# Altium PCB STM32Ethernet.PcbDoc
Units mil, origin at the board's own origin, x right, y up, seen from the top; angles counter-clockwise.
Board outline 1771.65 x 2559.06 mil, 2 copper layers (Top Layer, Bottom Layer), stack 64.8 mil thick; 65 components, 62 nets, 409 pads, 108 vias.
Unrouted connection lines stored in the file: 16.
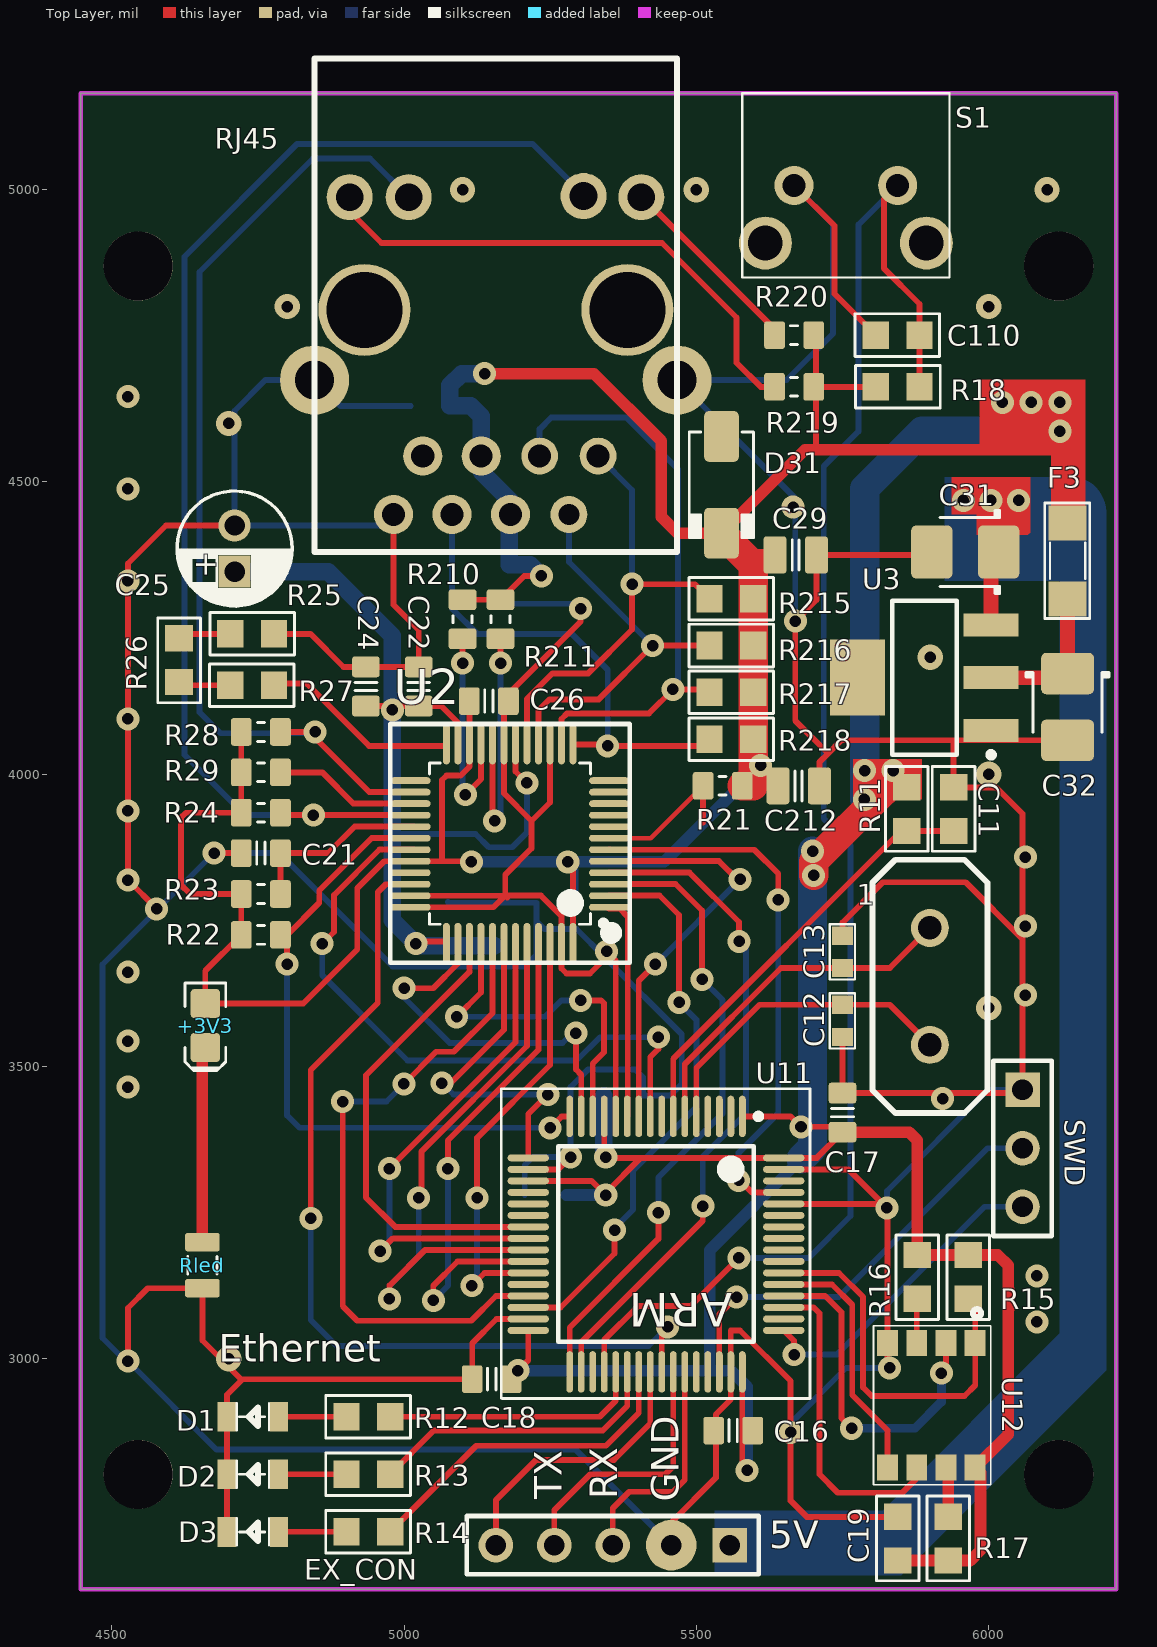
[diagram p0: Top Layer view]
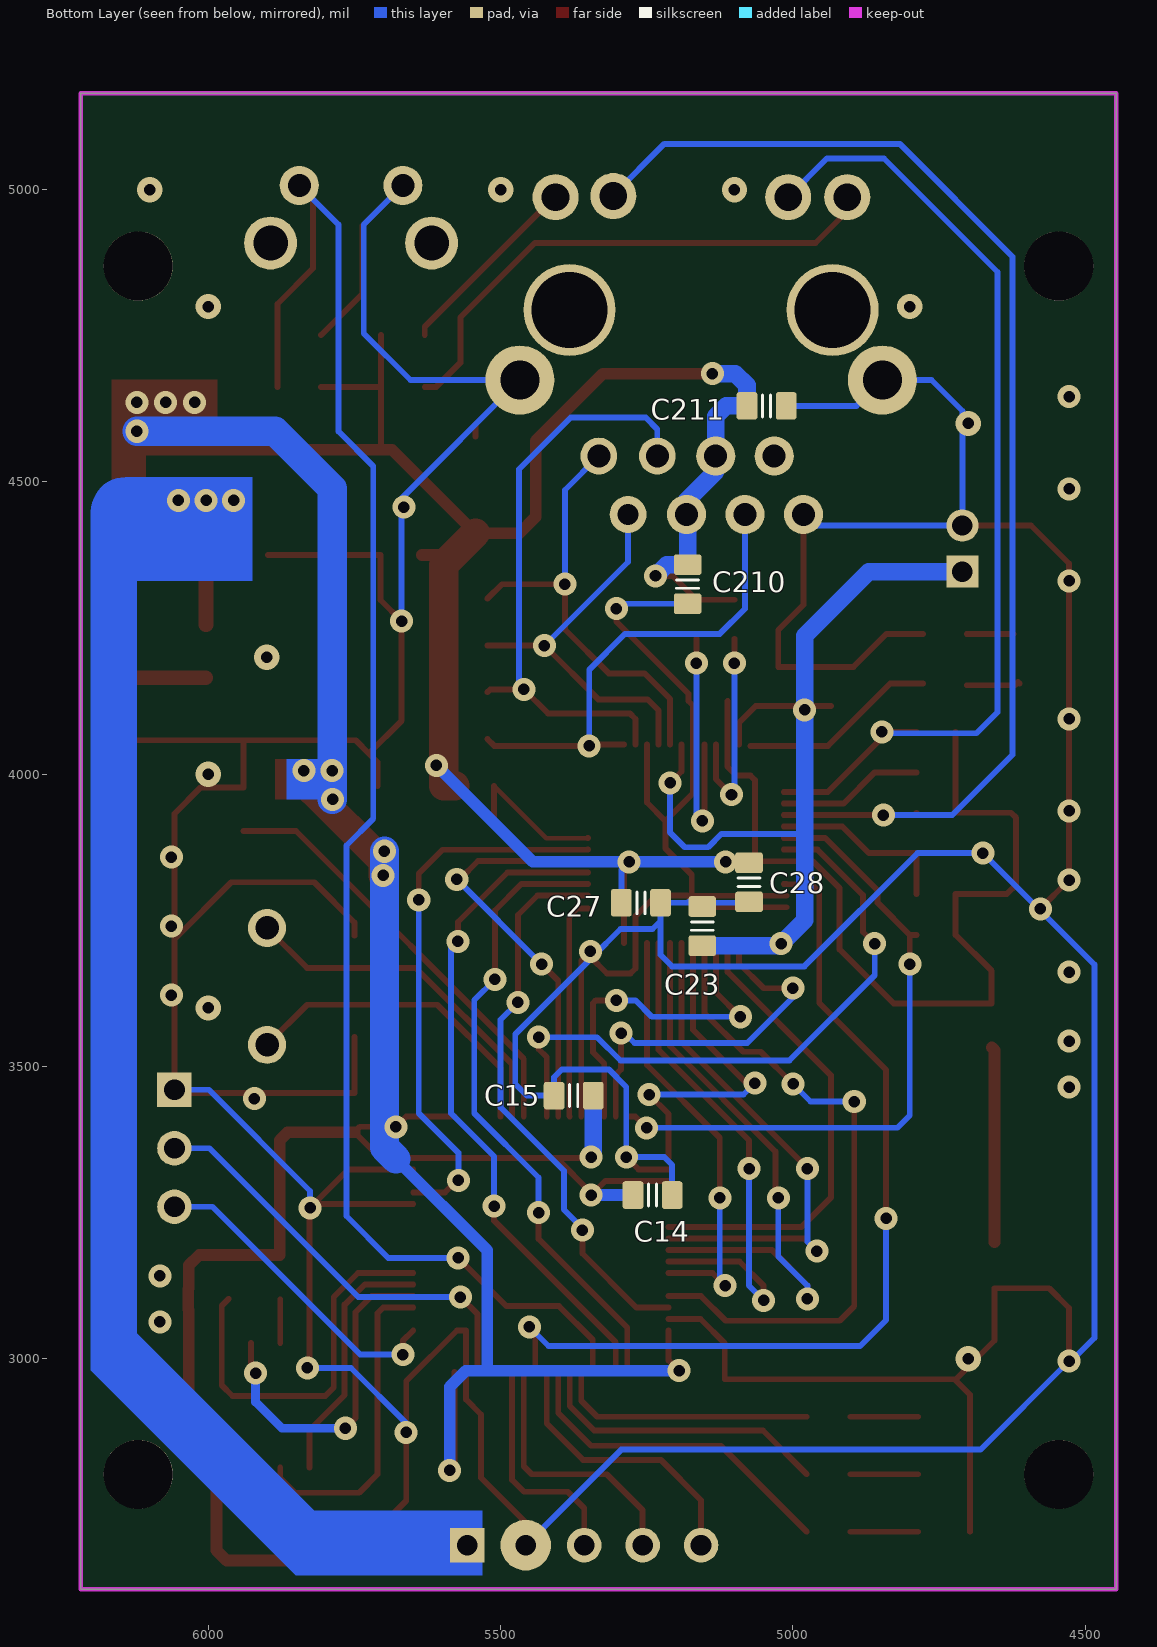
[diagram p1: Bottom Layer view, seen from below]
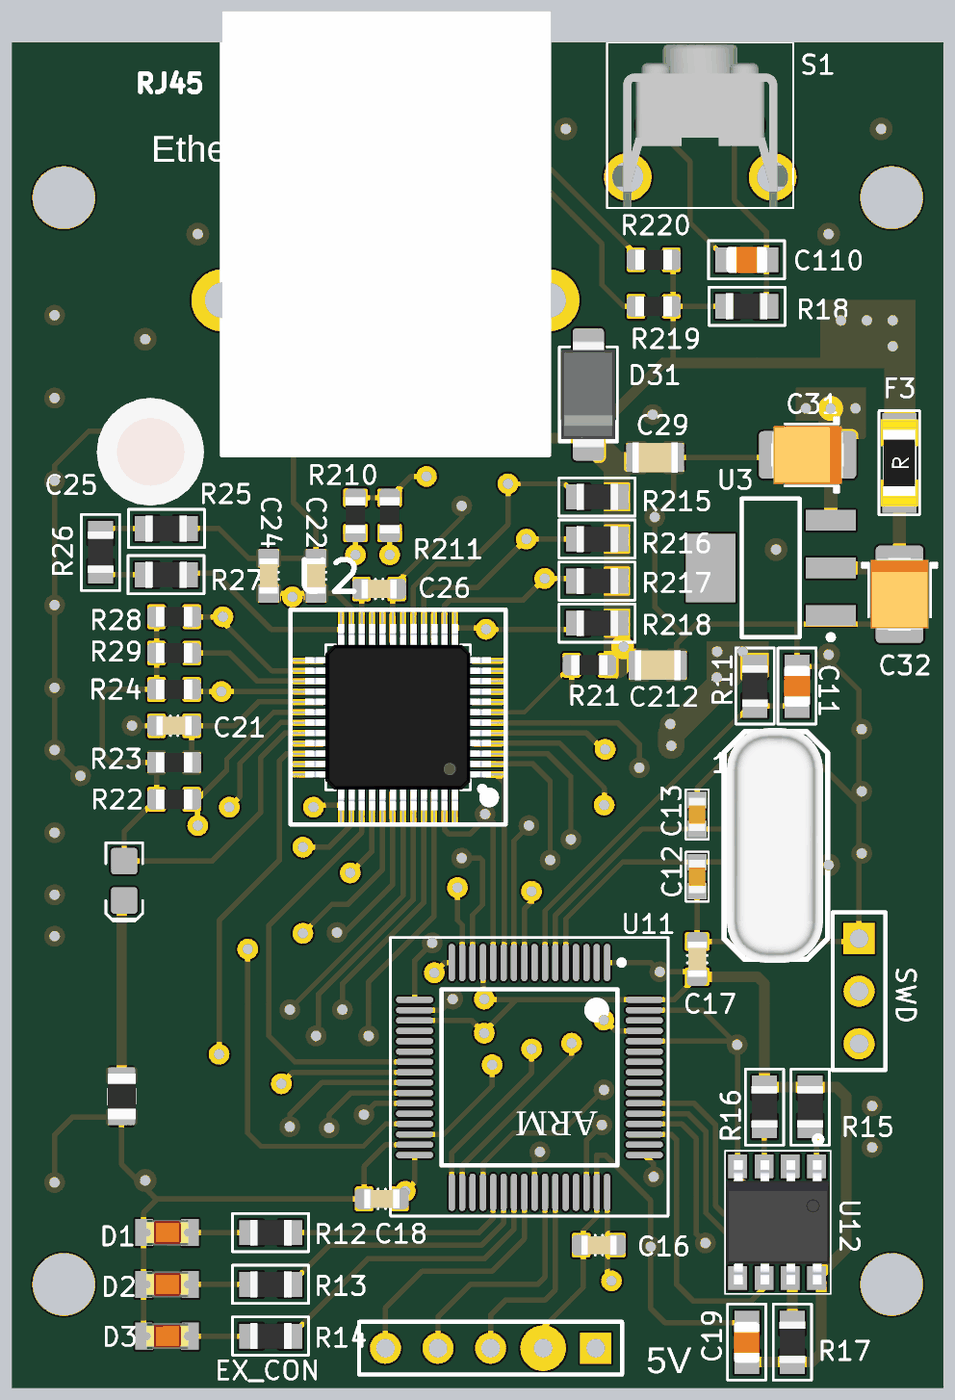
[diagram p2: 3D render of the assembled board from above, using the file's embedded part models]
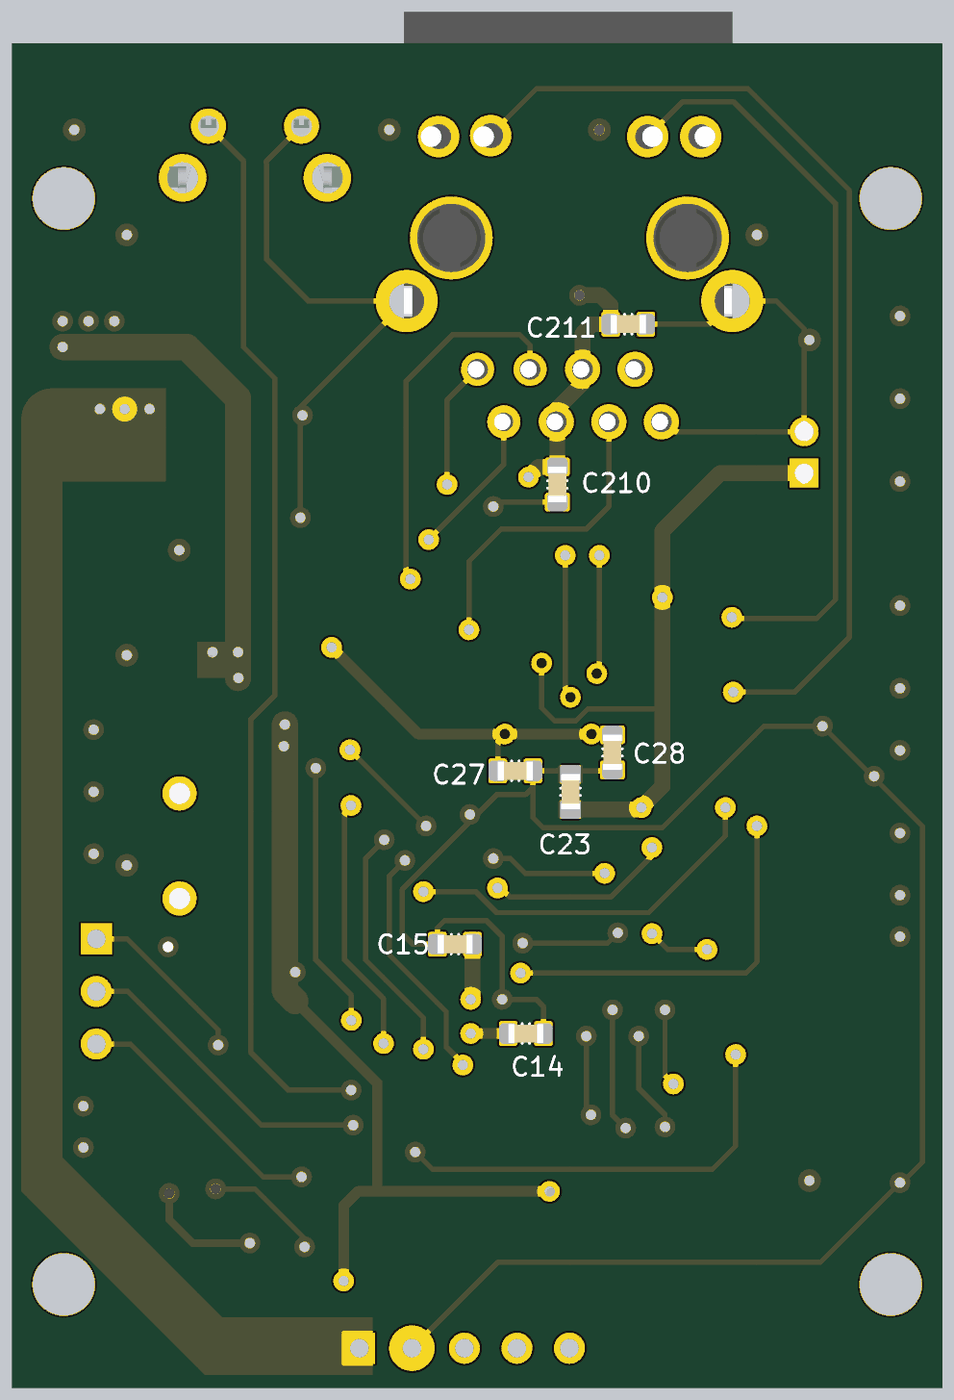
[diagram p3: 3D render of the assembled board from below, using the file's embedded part models]

## Layer stack, top to bottom
Top Solder: solder mask 0.4, Solder Resist, Dk 3.5
Top Layer: signal copper 1.4
Dielectric 1: dielectric 62, FR-4, Dk 4.8
Bottom Layer: signal copper 1.4
Bottom Solder: solder mask 0.4, Solder Resist, Dk 3.5

## Board outline
4446.73,2605.47 4446.73,5164.53 6218.39,5164.53 6218.39,2605.47

## Design rules (kind name [scope] priority, off if disabled: settings)
Clearance [All] p1: gap=7
Length [InNetClass('ETH_SIGN')] p1: maxlimit=1299.21 minlimit=1062.99
PlaneConnect [All] p1: planeconnectstyle=Relief reliefexpansion=20 reliefentries=4 reliefconductorwidth=25 reliefairgap=10
PolygonConnect PAD_GND [(InPadClass('All Pads') AND InNet('GND'))] p1: connectstyle=Relief reliefconductorwidth=25 reliefentries=4 polygonreliefangle="90 Angle" airgapwidth=10
PolygonConnect [All] p2: connectstyle=Direct reliefconductorwidth=10 reliefentries=4 polygonreliefangle="90 Angle" airgapwidth=10
RoutingVias [All] p1: holewidth=27.56 width=47.24 viastyle="Through Hole" minholewidth=19.68 minwidth=39.37 maxholewidth=196.85 maxwidth=196.85
SolderMaskExpansion [All] p1: expansion=4
Width Width_1 [All] p1: maxlimit=100 minlimit=8 preferedwidth=10
Width [InNetClass('ETH_SIGN')] p2: maxlimit=8 minlimit=8 preferedwidth=8
29 further rules are at their usual default settings.

## Classes and differential pairs
net class SPI_DATA: STM_SPI_MISO STM_SPI_MOSI STM_SPI_SCK
net class ETH_SIGN: MII_COL MII_CRS_WKUP MII_MDC MII_MDIO MII_RX_ER MII_RXD0 MII_RXD1 MII_RXD2 MII_RXD3 MII_TX_CLK MII_TX_EN MII_TXD0 MII_TXD1 MII_TXD2 MII_TXD3

## Components (designator, comment, footprint, x,y, rotation, side; value= is the part's Value field where it differs from the comment)
1 "CRY_25MHZ" cry 5899.49,3636.97 r270 top
+3V3 "Blue" LED-0805-K 4660,3570 r270 top
C11 "CAP_102_0603" CAP_0805_TOP 5940,3940 r90 top
C12 "CAP_18pF_0603" CAP_0603_TOP 5749.88,3577.91 r270 top
C13 "CAP_18pF_0603" CAP_0603_TOP 5749.88,3696.02 r90 top
C14 "CAP_104_0603" CAPC1608N_F#1 5240,3280 r180 bottom
C15 "CAP_104_0603" CAPC1608N_F#1 5375,3450 r0 bottom
C16 "CAP_104_0603" CAPC1608N_F#2 5563,2877 r180 top
C17 "CAP_104_0603" CAPC1608N_F#2 5750,3421 r90 top
C18 "CAP_104_0603" CAPC1608N_F#2 5150,2965 r180 top
C19 "CAP_104_0603" CAP_0805_TOP 5844.37,2692.09 r90 top
C21 "CAP_102_0603" CAPC1608N_F#2 4755,3865 r0 top
C22 "CAP_104_0603" CAPC1608N_F#3 5025,4150 r270 top
C23 "CAP_104_0603" CAPC1608N_F#4 5155,3740 r270 bottom
C24 "CAP_104_0603" CAPC1608N_F#3 4934.75,4150 r270 top
C25 "CAP_10uF/35V" CAP_10uF/35V 4710,4385 r90 top
C26 "CAP_104_0603" CAPC1608N_F#2 5145,4125 r180 top
C27 "CAP_104_0603" CAPC1608N_F#1 5260,3780 r180 bottom
C28 "CAP_104_0603" CAPC1608N_F#1 5075,3815 r90 bottom
C29 "CAP_104_0603" CAPC2012N_F 5670,4375 r0 top
C31 "330uF/25V" CAPMP3528X210N 5960,4380 r180 top
C32 "330uF/25V" CAPMP3528X210N 6135,4115 r270 top
C110 "CAP_102_0603" CAP_0805_TOP 5844.37,4751.14 r180 top
C210 "105" CAPC1608N_F#1 5180,4325 r270 bottom
C211 "105" CAPC1608N_F#1 5045,4630 r180 bottom
C212 "105" CAPC2012N_F 5675,3980 r0 top
D1 "LED_RED_0805" "LED 0805 TOP" 4742.01,2900.75 r0 top
D2 "LED_BLUE_0805" "LED 0805 TOP" 4742.01,2802.32 r0 top
D3 "LED_GREEN_0805" "LED 0805 TOP" 4742.01,2703.9 r0 top
D31 "Diode" DO-214AC 5543,4495 r270 top
EX_CON "EX_CON" HDR1X5 5557,2681 r180 top
F3 "fuse_200mA_1206" "SMD 1206" 6135,4365 r90 top
R11 "Res_4.7K_0805" RES_0805_TOP 5860,3940 r90 top
R12 "Res_330R_0805" RES_0805_TOP 4938.86,2900.75 r180 top
R13 "Res_330R_0805" RES_0805_TOP 4938.86,2802.32 r180 top
R14 "Res_330R_0805" RES_0805_TOP 4938.86,2703.9 r180 top
R15 "Res_4.7K_0805" RES_0805_TOP 5965,3140 r270 top
R16 "Res_4.7K_0805" RES_0805_TOP 5878,3140 r270 top
R17 "Res_4.7K_0805" RES_0805_TOP 5930.98,2692.09 r90 top
R18 "Res_4.7K_0805" RES_0805_TOP 5844.37,4662.56 r0 top
R21 "Res_2.2K_0805" RESC1608N_F#1 5545,3980 r0 top
R22 "Res_1.5K_0805" RESC1608N_F#1 4755,3725 r0 top
R23 "Res_4.7K_0805" RESC1608N_F#2 4755,3795 r180 top
R24 "Res_2.2K_0805" RESC1608N_F#1 4755,3934.07 r180 top
R25 "Res_47R_0805" RES_0805_TOP 4740,4240 r0 top
R26 "Res_120R_0805" RES_0805_TOP 4615,4195 r270 top
R27 "Res_4.7K_0805" RES_0805_TOP 4740,4152.16 r180 top
R28 "Res_0R_0603" RESC1608N_F#1 4755,4072.2 r0 top
R29 "Res_0R_0603" RESC1608N_F#1 4755,4003.13 r180 top
R210 "2k2" RESC1608N_F#1 5100,4265 r90 top
R211 "2k2" RESC1608N_F#1 5165,4265 r90 top
R215 "Res_49.9R_0805" RES_0805_TOP 5560,4300 r180 top
R216 "Res_49.9R_0805" RES_0805_TOP 5560,4220 r180 top
R217 "Res_49.9R_0805" RES_0805_TOP 5560,4140 r180 top
R218 "Res_49.9R_0805" RES_0805_TOP 5560,4060 r180 top
R219 "220R" RESC1608N_F#1 5667.2,4662.56 r180 top
R220 "220R" RESC1608N_F#1 5667.2,4751.14 r180 top
RJ45 "HR911105A" HR911105A 4845,4370 r0 top
Rled "Res_0805_1k" RESC2012N_F 4655,3160 r270 top
S1 "BUTTON 2P" "Nut nhan 2 chan  dung" 5765.63,5007.05 r0 top
SWD "Header 3" HDR1X3 6058,3460 r270 top
U2 "DP83848CVV" LQFP48 5181,3881 r180 top
U3 "AS1117-3V3" SOT223-4N 5890,4165 r180 top
U11 "STM32F107" LQFP64_N 5430.98,3196.02 r270 top locked
U12 "S25FL204K" SOIC_8 5903.43,2920.43 r270 top

## Footprints (in the part's own frame and the unit in brackets; to place one, negate y for a bottom-side part, rotate by r counter-clockwise, add the part's x,y. Pads: shape width x height; smd on the part's side, far side on the other; paste and mask are expansions set on the pad)
CAP_10uF/35V [mil]
  rect 55.12x55.12 hole 35: 1(-38.39,0)
  round 55 hole 35: 2(40.35,0)
  silkscreen extent -97,-98 99,98, body extent -101,-101 104,101, height 30
CAP_0603_TOP [mm]
  rect 0.8x0.9 smd: 1(-0.7,0) 2(0.7,0)
  silkscreen extent -1.2,-0.55 1.2,0.55, body extent -0.8,-0.4 0.8,0.4, height 0.7
CAP_0805_TOP [mm]
  rect 1.14x1.2 smd: 1(-0.95,0) 2(0.95,0)
  silkscreen extent -1.83,-0.92 1.85,0.93, body extent -1,-0.62 1,0.63, height 0.8
CAPC1608N_F#1 [mm] "Chip Capacitor, Body 1.6x0.8mm, 0603, IPC Medium Density, for Flex circuits"
  round 0.254 on Mech14: 0(0,0)
  rrect50% 1.1x1 on Bottom Solder: 1(-0.85,0) 1(0.85,0)
  rrect25% 0.9x1.2 smd paste-1: 1(-0.85,0) 2(0.85,0)
  rrect50% 0.9x1 on Bottom Paste: 1(-0.85,0) 1(0.85,0)
  Top Layer pour cut-out: -0.4,0.6 0.4,0.6 0.4,-0.6 -0.4,-0.6
  silkscreen extent -0.18,-0.48 0.18,0.48, body extent -0.85,-0.45 0.85,0.45, height 0.89
CAPC1608N_F#2 [mm] "Chip Capacitor, Body 1.6x0.8mm, 0603, IPC Medium Density, for Flex circuits"
  round 0.254 on Mech14: 0(0,0)
  rrect50% 1.1x1 on Top Solder: 1(-0.85,0) 1(0.85,0)
  rrect25% 0.9x1.2 smd paste-1: 1(-0.85,0) 2(0.85,0)
  rrect50% 0.9x1 on Top Paste: 1(-0.85,0) 1(0.85,0)
  Top Layer pour cut-out: -0.4,0.6 0.4,0.6 0.4,-0.6 -0.4,-0.6
  silkscreen extent -0.18,-0.48 0.18,0.48, body extent -0.85,-0.45 0.85,0.45, height 0.89
CAPC1608N_F#3 [mm] "Chip Capacitor, Body 1.6x0.8mm, 0603, IPC Medium Density, for Flex circuits"
  round 0.254 on Mech14: 0(0,0)
  rrect25% 1.1x1 on Top Solder: 1(-0.85,0) 1(0.85,0)
  rrect25% 0.9x1.2 smd paste-1: 1(-0.85,0) 2(0.85,0)
  rrect25% 0.9x1 on Top Paste: 1(-0.85,0) 1(0.85,0)
  Top Layer pour cut-out: -0.4,0.6 0.4,0.6 0.4,-0.6 -0.4,-0.6
  silkscreen extent -0.18,-0.48 0.18,0.48, body extent -0.85,-0.45 0.85,0.45, height 0.89
CAPC1608N_F#4 [mm] "Chip Capacitor, Body 1.6x0.8mm, 0603, IPC Medium Density, for Flex circuits"
  round 0.254 on Mech14: 0(0,0)
  rrect25% 1.1x1 on Bottom Solder: 1(-0.85,0) 1(0.85,0)
  rrect25% 0.9x1.2 smd paste-1: 1(-0.85,0) 2(0.85,0)
  rrect25% 0.9x1 on Bottom Paste: 1(-0.85,0) 1(0.85,0)
  Top Layer pour cut-out: -0.4,0.6 0.4,0.6 0.4,-0.6 -0.4,-0.6
  silkscreen extent -0.18,-0.48 0.18,0.48, body extent -0.85,-0.45 0.85,0.45, height 0.89
CAPC2012N_F [mm] "Chip Capacitor, Body 2.0x1.2mm, 0805, IPC Medium Density, for Flex circuits"
  round 0.254 on Mech14: 0(0,0)
  rrect25% 1.2x1.4 on Top Solder: 1(-0.9,0) 1(0.9,0)
  rrect25% 1x1.6 smd paste-1: 1(-0.9,0) 2(0.9,0)
  rrect25% 1x1.4 on Top Paste: 1(-0.9,0) 1(0.9,0)
  Top Layer pour cut-out: -0.4,0.8 0.4,0.8 0.4,-0.8 -0.4,-0.8
  silkscreen extent -0.15,-0.65 0.15,0.65, body extent -1.1,-0.72 1.1,0.73, height 1.34
CAPMP3528X210N [mm] "Molded body capacitor, Body 3.5x2.8mm, 1210, IPC Nominal settings"
  round 0.254 on Mech14: 0(0,0)
  rrect25% 1.8x2.3 smd: 1(-1.45,0) 2(1.45,0)
  Top Layer pour cut-out: -0.508,1.27 0.508,1.27 0.508,-1.27 -0.508,-1.27
  silkscreen extent -1.5,-1.8 1.1,1.8, body extent -1.75,-1.4 1.75,1.4, height 2.1
cry [mil]
  round 65 hole 40: 1(-100,0) 2(100,0)
  silkscreen extent -217,-98 217,98, body extent -223,-93 223,90, height 146
DO-214AC [mm] "JEDEC DO214 variation AC. SMA"
  round 0.508 on Mech14: 0(0,0)
  rrect25% 2.2x1.5 smd: A(-2.1,0) K(2.1,0)
  silkscreen extent -2.3,-1.4 2.3,1.4, body extent -2.6,-1.3 2.6,1.3, height 2.42
HDR1X3 [mm] "Connector; Header; 3 Position"
  rect 1.5x1.5 hole 0.9: 1(0,0)
  round 1.5 hole 0.9: 2(2.54,0) 3(5.08,0)
  silkscreen extent -1.27,-1.27 6.35,1.27, body extent -1.27,-1.27 6.35,1.27, height 7
HDR1X5 [mm] "Connector; Header; 5 Position"
  rect 1.5x1.5 hole 0.9: 1(0,0)
  round 2.2 hole 0.9: 2(2.54,0)
  round 1.5 hole 0.9: 3(5.08,0) 4(7.62,0) 5(10.16,0)
  silkscreen extent -1.27,-1.27 11.43,1.27
HR911105A [mm] "HanRun HR911105A"
  round 1.6 hole 1: 1(12.369,4.425) 3(9.829,4.425)
  round 1.6 hole 0.9: 2(11.099,1.885)
  round 1.7 hole 1: 4(8.559,1.885) 5(7.289,4.425) 6(6.019,1.885) 7(4.749,4.425) 8(3.479,1.885)
  round 2 hole 1.2: 9(14.249,15.675) 10(11.735,15.723) 11(4.139,15.675) 12(1.575,15.672)
  round 3 hole 1.7: G(0.049,7.725) G(15.799,7.725)
  round 4 hole 3.3: H(2.209,10.775) H(13.639,10.775)
  silkscreen extent 0.05,0.25 15.8,21.69, body extent 0.05,0.29 15.93,21.69, height 13.51
"LED 0805 TOP" [mm]
  rect 0.8x1.3 smd: 1(1.118,0) 2(-1.143,0)
  silkscreen extent -0.71,-0.58 0.69,0.58, body extent -1.01,-0.62 1.01,0.63, height 1.1
LED-0805-K [mil]
  round 20 on Mech14: 0(0,0)
  rrect25% 50x50 smd: A(-37.5,0) K(37.5,0)
  Top Layer pour cut-out: -15,30 15,30 15,-30 -15,-30
  silkscreen extent -72,-35 77,35, body extent -39,-25 39,25, height 31
LQFP48 [mm] "Thin QFP, 48-Leads, Body 7x7mm, Pitch 0.5mm, IPC Medium Density"
  oval 1.75x0.3 smd paste-0.102 mask+0.051: 1(-4.318,2.761) 2(-4.318,2.261) 3(-4.318,1.761) 4(-4.318,1.261) 5(-4.318,0.761) 6(-4.318,0.261) 7(-4.318,-0.239) 8(-4.318,-0.739) 9(-4.318,-1.239) 10(-4.318,-1.739) 11(-4.318,-2.239) 12(-4.318,-2.739) 25(4.318,-2.739) 26(4.318,-2.239) 27(4.318,-1.739) 28(4.318,-1.239) 29(4.318,-0.739) 30(4.318,-0.239) 31(4.318,0.261) 32(4.318,0.761) 33(4.318,1.261) 34(4.318,1.761) 35(4.318,2.261) 36(4.318,2.761)
  oval 0.3x1.75 smd paste-0.102 mask+0.051: 13(-2.743,-4.318) 14(-2.243,-4.318) 15(-1.743,-4.318) 16(-1.243,-4.318) 17(-0.743,-4.318) 18(-0.243,-4.318) 19(0.257,-4.318) 20(0.757,-4.318) 21(1.257,-4.318) 22(1.757,-4.318) 23(2.257,-4.318) 24(2.757,-4.318) 37(2.757,4.318) 38(2.257,4.318) 39(1.757,4.318) 40(1.257,4.318) 41(0.757,4.318) 42(0.257,4.318) 43(-0.243,4.318) 44(-0.743,4.318) 45(-1.243,4.318) 46(-1.743,4.318) 47(-2.243,4.318) 48(-2.743,4.318)
  silkscreen extent -5.2,-5.2 5.2,5.18, body extent -4.5,-4.5 4.5,4.5, height 1.5
LQFP64_N [mm] "Thin QFP, 64-Leads, Body 10x10mm, Pitch 0.5mm, IPC Medium Density"
  oval 1.8x0.3 smd: 1(-5.55,3.75) 2(-5.55,3.25) 3(-5.55,2.75) 4(-5.55,2.25) 5(-5.55,1.75) 6(-5.55,1.25) 7(-5.55,0.75) 8(-5.55,0.25) 9(-5.55,-0.25) 10(-5.55,-0.75) 11(-5.55,-1.25) 12(-5.55,-1.75) 13(-5.55,-2.25) 14(-5.55,-2.75) 15(-5.55,-3.25) 16(-5.55,-3.75) 33(5.55,-3.75) 34(5.55,-3.25) 35(5.55,-2.75) 36(5.55,-2.25) 37(5.55,-1.75) 38(5.55,-1.25) 39(5.55,-0.75) 40(5.55,-0.25) 41(5.55,0.25) 42(5.55,0.75) 43(5.55,1.25) 44(5.55,1.75) 45(5.55,2.25) 46(5.55,2.75) 47(5.55,3.25) 48(5.55,3.75)
  oval 0.3x1.8 smd: 17(-3.75,-5.55) 18(-3.25,-5.55) 19(-2.75,-5.55) 20(-2.25,-5.55) 21(-1.75,-5.55) 22(-1.25,-5.55) 23(-0.75,-5.55) 24(-0.25,-5.55) 25(0.25,-5.55) 26(0.75,-5.55) 27(1.25,-5.55) 28(1.75,-5.55) 29(2.25,-5.55) 30(2.75,-5.55) 31(3.25,-5.55) 32(3.75,-5.55) 49(3.75,5.55) 50(3.25,5.55) 51(2.75,5.55) 52(2.25,5.55) 53(1.75,5.55) 54(1.25,5.55) 55(0.75,5.55) 56(0.25,5.55) 57(-0.25,5.55) 58(-0.75,5.55) 59(-1.25,5.55) 60(-1.75,5.55) 61(-2.25,5.55) 62(-2.75,5.55) 63(-3.25,5.55) 64(-3.75,5.55)
  silkscreen extent -5.67,-4.25 4.25,4.58, body extent -5,-5 5,5, height 1.6
"Nut nhan 2 chan  dung" [mm]
  round 1.7 hole 1: 1(2,0) 2(-2.5,0)
  round 2.3 hole 1.5: 3(-3.75,-2.5) 4(3.25,-2.5)
  silkscreen extent -4.75,-4 4.25,4, body extent -4.55,-3.95 4.05,3.9, height 7.8
RES_0805_TOP [mm]
  rect 1.14x1.2 smd: 1(-0.95,0) 2(0.95,0)
  silkscreen extent -1.83,-0.92 1.85,0.93, body extent -1,-0.62 1,0.62, height 0.5
RESC1608N_F#1 [mm] "Chip Resistor, Body 1.6x0.8mm, 0603, IPC Medium Density, for Flex circuits"
  round 0.254 on Mech14: 0(0,0)
  rrect50% 1.1x1 on Top Solder: 1(-0.85,0) 1(0.85,0)
  rrect25% 0.9x1.2 smd paste-1: 1(-0.85,0) 2(0.85,0)
  rrect50% 0.9x1 on Top Paste: 1(-0.85,0) 1(0.85,0)
  Top Layer pour cut-out: -0.4,0.6 0.4,0.6 0.4,-0.6 -0.4,-0.6
  silkscreen extent -0.15,-0.41 0.15,0.41, body extent -0.87,-0.47 0.88,0.48, height 0.54
RESC1608N_F#2 [mm] "Chip Resistor, Body 1.6x0.8mm, 0603, IPC Medium Density, for Flex circuits"
  round 0.254 on Mech14: 0(0,0)
  rrect25% 1.1x1 on Top Solder: 1(-0.85,0) 1(0.85,0)
  rrect25% 0.9x1.2 smd paste-1: 1(-0.85,0) 2(0.85,0)
  rrect25% 0.9x1 on Top Paste: 1(-0.85,0) 1(0.85,0)
  Top Layer pour cut-out: -0.4,0.6 0.4,0.6 0.4,-0.6 -0.4,-0.6
  silkscreen extent -0.15,-0.41 0.15,0.41, body extent -0.87,-0.47 0.88,0.48, height 0.54
RESC2012N_F [mm] "Chip Resistor, Body 2.0x1.2mm, 0805, IPC Medium Density"
  round 0.254 on Mech14: 0(0,0)
  rrect25% 1x1.3 on Top Solder: 1(-1,0) 1(1,0)
  rrect25% 0.8x1.5 smd paste-1: 1(-1,0) 2(1,0)
  rrect25% 0.8x1.3 on Top Paste: 1(-1,0) 1(1,0)
  Top Layer pour cut-out: -0.6,0.75 0.6,0.75 0.6,-0.75 -0.6,-0.75
  silkscreen extent -0.38,-0.64 0.38,0.64, body extent -1.1,-0.67 1.1,0.68, height 0.69
"SMD 1206" [mil]
  rect 60x65 smd: 1(-65,0) 2(65,0)
  silkscreen extent -99,-38 99,39, body extent -83,-35 83,36, height 25
SOIC_8 [mm]
  rect 1.14x0.91 smd: 1(-2.7,1.87) 2(-2.7,0.6) 3(-2.7,-0.67) 4(-2.7,-1.94) 5(2.7,-1.94) 6(2.7,-0.67) 7(2.7,0.6) 8(2.7,1.87)
  silkscreen extent -4.17,-2.55 3.45,2.55, body extent -3,-2.5 3.01,2.5, height 1.75
SOT223-4N [mm]
  rect 2.4x1 smd: 1(-2.9,2.3) 2(-2.9,0) 3(-2.9,-2.3)
  rect 2.4x3.3 smd: 4(2.9,0)
  silkscreen extent -3.03,-3.35 1.4,3.47, body extent -1.85,-3.35 1.85,3.35, height 1.8

## Part data
1: library part cry, "Crystal Oscillator"
+3V3: library part LED_SMD_Blue_0805_100mcd, "LED 0805 SMD Blue 100mcd 470nm"
C11 C12 C13 C14 C15 C16 C17 C18 C19 C21 C22 C23 C24 C26 C27 C28 C29 C110 C210 C211 C212: library part "Cap 1206 BUT", "Capacitor"
C25: library part "CAP P"
C31 C32: library part CP4, "Cap 1000uF/16V - 220uF/50V"
D1 D2 D3: library part "LED 0805 TOP", "Typical INFRARED GaAs LED"
EX_CON: library part "Header 5", "Header, 5-Pin"
F3: library part "Fuse Thermal", "Thermal Fuse"
R11 R12 R13 R14 R15 R16 R17 R18 R21 R22 R23 R24 R25 R26 R27 R28 R29 R215 R216 R217 R218 R219 R220: library part Res, "Resistor"
R210 R211 Rled: library part Res
RJ45: library part RJ45-LED
S1: "Switch"
SWD: "Header, 3-Pin"
U3: library part AS1117
U11: library part STM32F103RBT6, "STM32 ARM-based 32-bit MCU with 128 Kbytes Flash, 64-pin LQFP, Industrial Temperature"

## Free pads (board coordinates)
  round 118.11 hole 118.11: 1(4545.16,2802.32) 1(4545.16,4869.25) 1(6119.96,2802.32) 1(6119.96,4869.25)

## Via types
v1: diameter 39.37, hole 19.68, Top Layer to Bottom Layer, tented both sides, 59 vias
v2: diameter 39.37, hole 19.68, Top Layer to Bottom Layer, 39 vias
v3: diameter 43.31, hole 19.68, Top Layer to Bottom Layer, tented both sides, 10 vias

## Nets (pads, with @x,y where several pads share a name; then routed paths per layer and width w, separated by ;. In a path a pad name is that pad's centre, name@x,y a point inside that pad or via, vN(x,y) a via of type N, cw(c..) or ccw(c..) an arc to the next point about the centre after c; other vN are vias at no path point)
3.3V: +3V3.A C14.1@5273.46,3280 C15.1@5341.54,3450 C16.1@5596.46,2877 C17.1@5750,3387.54 C18.1@5183.46,2965 C19.1 C26.2 C27.1@5293.46,3780 C28.2 C29.1@5634.57,4375 C210.1@5180,4358.46 C211.1@5078.46,4630 C212.1@5639.57,3980 D31.K F3.2 R11.2 R15.1 R16.1 R17.1 R18.1 R21.2 R22.1@4721.54,3725 R23.2 R24.2 R28.1@4721.54,4072.2 R29.2 R210.2 R211.2 R215.1 R216.1 R217.1 R218.1 R219.1@5700.67,4662.56 R220.1@5700.67,4751.14 RJ45.4 RJ45.5 U2.22 U2.32 U2.48 U11.1 U11.13 U11.19 U11.32 U11.48 U11.64 U12.8 | length 10588.1
  Top Layer w10: R28.1@4721.54,4072.2 R24.2 4626.98,3934.07 4618.11,3925.2 4618.11,3811.02 4634.13,3795 R23.2 4721.54,3725 4660,3663.46 +3V3.A 4827.5,3607.5 4920,3700 4920,3805 4966.04,3851.04 U2.32 5113.96,3851.04 v2(5115,3850) ; 5065,3851.54 5065,3990 5072.5,3997.5 5096.5,3997.5 5111.83,4012.83 U2.22 5111.83,4124.7 C26.2 ; R210.2 R211.2 5205.54,4339 v2(5235,4339) ; RJ45.4@5183.23,4433.23 RJ45.4@5183.23,4444.96 ; v2(5194.76,2979.49) 5212.48,2997.2 U11.32 ; U11.19 5320.71,3304.29 v2(5345,3280) 5345,3283.66 5405,3343.66 ; v2(5280,3850) 5289,3841 5289,3814 U2.48 ; U11.13 5342.4,3347.6 v2(5345,3345) 5346.34,3343.66 5405,3343.66 ; U11.48 5578.62,2817.38 v2(5587,2809) ; U11.1 5661.3,3414.53 v1(5679.02,3396.81) 5740.72,3396.81 5750,3387.54 5706.13,3343.66 U11.64 5405,3343.66 ; 5704.61,4555.12 R219.1@5704.61,4662.56 ; R220.1@5704.61,4751.14 R219.1@5704.61,4662.56 ; R18.1 R219.1@5704.61,4662.56
  Top Layer w20: v1(5137.8,4685.04) 5324.96,4685.04 5440,4570 5440,4440 5467.68,4412.32 D31.K 5685.8,4555.12 5704.61,4555.12 6114.17,4555.12 6135,4534.29 ; R215.1 5597.4,4375 C29.1@5634.57,4375 ; C17.1@5750,3387.54 5864.43,3387.54 5878,3373.97 R16.1 R15.1 6015.75,3177.4 6033.31,3159.84 6033.31,3120.19 6034.4,3119.09 6034.4,3084.54 6033.31,3083.44 6033.31,2870.39 U12.8 5986.1,2805.08 5986.1,2672.4 5968.39,2654.68 R17.1 C19.1 ; v1(5788,4005.91) 5822.15,3971.76 ; 5816.5,3977.4 R11.2 ; 6102.36,4622.05 6135,4589.41 6135,4534.29 ; F3.2 6135,4534.29
  Top Layer w50: D31.K 5597.4,4357.92 R215.1 R216.1 R217.1 R218.1 5597.4,3980 R21.2 ; v1(5700.79,3826.77) 5700.79,3850.39 5822.15,3971.76
  Bottom Layer w10: RJ45.4@5180,4442.24 RJ45.4 ; v2(5280,3850) 5293.46,3836.54 C27.1@5293.46,3780 ; v2@5341.54,3348.46 v2(5345,3345)
  Bottom Layer w20: v2(5115,3850) v2(5280,3850) 5445,3850 v2(5610,4015) ; RJ45.5@5133.23,4516.38 RJ45.5@5133.23,4542.93 ; v2(5194.76,2979.49) 5524,2979.49 ; C14.1@5277.4,3280 5340,3280 v2(5345,3280) ; v2(5587,2809) 5587,2952 5559.51,2979.49 5524,2979.49 ; 5679.02,3341.69 5523,3185.68 5523,2980.49 5524,2979.49
  Bottom Layer w30: RJ45.5@5133.23,4516.38 5181.96,4467.65 RJ45.4 ; RJ45.5@5133.23,4542.93 RJ45.5 5131.96,4612.13 5114.09,4630 5078.46,4630 5078.46,4665.08 5098.43,4685.04 v1(5137.8,4685.04) ; RJ45.4@5180,4442.24 5180,4358.46 5215.54,4358.46 v2(5235,4339) ; v2@5341.54,3348.46 C15.1@5341.54,3450
  Bottom Layer w50: 5679.02,3341.69 5698.82,3361.5 v1(5698.82,3868.11) v1@5698.82,3868.23 ; v1@5788,3956.69 5788,4488.79 5885.83,4586.61 v1(6122.05,4586.61)
  other v1: 5787.4,3956.69 5836.61,4005.91 6023.62,4635.83 6072.83,4635.83 6122.05,4635.83
25M_OUT: U2.25
+3V3: C32.1 F3.1 U3.2 | length 251.7
  Top Layer w25: U3.2 C32.1@6127.91,4165 ; C32.1 F3.1
+5V: C31.1 EX_CON.1 U3.3 | length 2588.7
  Top Layer w25: U3.3@6003.94,4255.31 v2(6003.94,4468.5) ; U3.3 6004.17,4367.09 C31.1
  Bottom Layer w50: EX_CON.1 5822.73,2681 6169.29,3027.56 6169.29,4212.6 6169.29,4350.39 v1(6051.18,4468.5)
  other v1: 5956.69,4468.5
ETH_MCO: U2.34 U11.41 | length 1568.7
  Top Layer w10: v2(4840.43,3240) 4840.43,3493.98 4955,3608.54 4955,3798 4968.67,3811.67 U2.34 ; U2.34@5011,3812.17 U2.34@5015.63,3812.17 ; U11.41 5440.83,3044.45 v1(5450.67,3054.29)
  Bottom Layer w10: v2(4840.43,3240) 4840.43,3066.1 4884.88,3021.65 5418.03,3021.65 v1(5450.67,3054.29)
GND: C11.2 C12.2 C13.2 C14.2 C15.2 C16.2 C17.2 C18.2 C19.2 C21.1@4721.54,3865 C22.1@5025,4183.46 C23.1@5155,3773.46 C24.1@4934.75,4183.46 C25.2 C26.1@5178.46,4125 C27.2 C28.1@5075,3781.54 C29.2 C31.2 C32.2 C110.2 C210.2 C211.2 C212.2 D1.2 D2.2 D3.2 D31.A EX_CON.2 R25.2 RJ45.7 RJ45.8 RJ45.G Rled.2 S1.2 SWD.1 U2.15 U2.19 U2.35 U2.36 U2.47 U3.1 U11.12 U11.18 U11.31 U11.47 U11.60 U11.63 U12.4 | length 15273.3
  Top Layer w10: v1(4527.56,2996.06) 4527.56,3086.61 4561.57,3120.63 Rled.2 4655,3031.06 4722.32,2963.74 4723.58,2965 ; v1(4576.77,3769.68) v1(4527.56,3818.9) 4527.56,4360.24 4592.68,4425.35 C25.2 ; v1(4675,3865) C21.1@4721.54,3865 ; D3.2 D2.2 D1.2 4697.01,2938.43 4723.58,2965 ; R25.2 4840,4240 4896.54,4183.46 4934.75,4183.46 5025,4183.46 5025,4246.65 4981.96,4289.69 RJ45.8 ; U2.36 5152.93,3772.3 5172.61,3791.98 U2.35 ; 5173.11,3792.48 5173.11,3828.11 5218.11,3873.11 5218.11,3920 ; 5176.56,3789.04 5180,3792.48 5234,3792.48 5269.31,3757.17 U2.47 5269.31,3667.69 5278,3659 5318,3659 5346.46,3687.46 v1(5346.46,3696.85) 5362.09,3681.22 U11.12 ; U11.31 5158.07,3068.07 5116.54,3026.54 C18.2 4723.58,2965 ; U11.18 5263.98,3323.98 v1(5285,3345) ; U2.15 5249.63,3951.52 5218.11,3920 ; v1(5302,4283) 5302,4261 5178.46,4137.46 5178.46,4125 5170.89,4117.43 U2.19 5170.89,3967.22 5218.11,3920 ; EX_CON.2 5457,2720 5533.35,2796.35 5533.35,2904.69 5558.94,2930.28 U11.47 5558.94,3048.39 5574.68,3048.39 5661.3,2961.77 5661.3,2757.05 5688.86,2729.49 C19.2 ; D31.A D31.A@5543,4598.12 ; U11.60 v1@5819.08,3264.92 ; U11.63@5649.77,3323.7 U11.63 5760.02,3323.98 v1@5819.08,3264.92 ; S1.2 5736.22,4938.03 5736.22,4821.89 C110.2 ; C212.2 5710.43,4020.43 5725.43,4035.43 ; C12.2 5750,3550.24 C17.2 6052.46,3454.46 SWD.1 6058,3717.59 ; C13.2 5749.88,3745.94 5818.9,3814.96 5960.63,3814.96 6058,3717.59 ; v1(5830.71,2984.25) 5827.05,2987.91 U12.4 5827.05,3256.95 v1@5819.08,3264.92 ; C31.2@5897.91,4375 C29.2 5705.43,4297.95 v1(5669.29,4261.81) 5669.29,4091.57 5725.43,4035.43 ; C32.2 5941.46,4057.91 ; 5725.43,4035.43 5747.91,4057.91 5941.46,4057.91 ; 5941.46,4057.91 5940,4056.46 C11.2 6012.76,3977.4 6058,3932.16 6058,3717.59
  Bottom Layer w10: RJ45.8 4963.12,4425.35 C25.2 4710,4621.42 4762.7,4674.12 4846.92,4674.12 4891.04,4630 C211.2 ; C28.1@5075,3781.54 5076.54,3780 5180,3780 ; C23.1@5178.46,3781.54 5180,3780 ; C210.2 v1@5293.46,4291.54 ; C14.2 5206.54,3331.54 5220,3345 v1(5285,3345) 5285,3465 5315,3495 5395,3495 5408.46,3481.54 C15.2 5455,3450 5475,3470 5475,3555 v1@5343,3687 ; v1@5342.5,3687.5 5295,3735 5240,3735 5226.54,3748.46 ; EX_CON.2 5293.51,2844.49 4679.13,2844.49 v1(4527.56,2996.06) 4523.62,2996.06 4484.25,3035.43 4484.25,3674.25 v1(4675,3865) 4786.57,3865 4980.31,3671.26 5206.69,3671.26 5226.54,3691.1 5226.54,3748.46 ; v1(5661.42,2874.02) 5661.42,2889.76 5755.91,2984.25 v1(5830.71,2984.25) ; S1.2 5734.13,4940.12 5734.13,4936.41 5734.01,4936.28 5734.01,4753.94 5654.19,4674.12 5467,4674.12 5669.29,4471.83 v1(5669.29,4261.81) ; v1(5826,3258) 5826,3287 5999,3460 SWD.1 ; 5180,3780 C27.2 5226.54,3748.46
  other v1: 6082.68,3062.99 6082.68,3141.73 5921.26,3444.88 4527.56,3464.57 4527.56,3543.31 6062.99,3622.05 4527.56,3661.42 6062.99,3740.16 6062.99,3858.27 4527.56,3937.01 4527.56,4094.49 4527.56,4330.71 5665.35,4456.69 4527.56,4488.19 4527.56,4645.67
  other v3: 4700,3000 6000,3600 6000,4000 5900,4200 4700,4600 4800,4800 6000,4800 5100,5000 5500,5000 6100,5000
INT: R21.1@5511.54,3980 U2.7 | length 261.3
  Top Layer w8: U2.7 5421.94,3890.41 R21.1@5511.54,3980
  Top Layer w10: U2.7@5350.28,3890.91 U2.7@5351,3890.91 ; 5511.54,3917.05 R21.1@5511.54,3980
LED_ACT: R28.2 RJ45.11 U2.26 | length 1716.5
  Top Layer w10: R28.2 v2@4837.8,4072.2 ; v2(4847.8,4072.2) v2@4837.8,4072.2 ; U2.26@5015.63,3969.65 4940.35,3969.65 v2@4837.8,4072.2
  Bottom Layer w10: v2(4847.8,4072.2) 4850,4070 4685.91,4070 4650,4105.91 4650,4859 4844.23,5053.23 4941.83,5053.23 RJ45.11
LED_LINK: R24.1@4788.46,3934.07 RJ45.10 U2.28 | length 2145.2
  Top Layer w10: R24.1@4788.46,3934.07 4792.25,3930.28 v2@4845,3930.28 ; v2(4845,3930) v2@4845,3930.28 ; U2.28@5015.63,3930.28 v2@4845,3930.28
  Bottom Layer w10: v2(4845,3930) 4727.48,3930 4624.21,4033.27 4624.21,4885.21 4817.23,5078.23 5219.8,5078.23 RJ45.10@5308.27,4989.76
LED_SPEED: R29.1@4788.46,4003.13 U2.27 | length 249.2
  Top Layer w10: R29.1@4788.46,4003.13 4860,4003.13 4913.17,3949.96 U2.27@5015.63,3949.96
MII_COL: U2.42 U11.17 | length 603.4
  Top Layer w10: v1(5064.84,3471.61) 5079.72,3471.61 5170.89,3562.78 U2.42 ; U11.17 5212.48,3418.46 v1(5245.94,3451.93)
  Bottom Layer w10: v1(5064.84,3471.61) 5084.53,3451.93 v1(5245.94,3451.93)
MII_CRS_WKUP: U2.40 U11.14 | length 610.3
  Top Layer w10: v2(5090,3585) 5131.52,3626.52 U2.40 ; v1(5302,3613) 5337,3613 5342,3608 5342,3524.28 5322.72,3505 U11.14
  Bottom Layer w10: v2(5090,3585) 5241.22,3585 5269.22,3613 v1(5302,3613)
MII_MDC: U2.31 U11.9 | length 1106.6
  Top Layer w10: v2(4860,3710) 4880,3730 4880,3793.08 4958.14,3871.22 U2.31@5015.63,3871.22 ; U11.9 5421.14,3516.14 5435,3530 v2(5435,3550)
  Bottom Layer w10: v2(4860,3710) 4860,3656 5006,3510 5295,3510 5335,3550 v2(5435,3550)
MII_MDIO: R22.2 U2.30 U11.16 | length 1117.4
  Top Layer w10: R22.2 R22.2@4800,3725 ; v2(4800,3675) R22.2@4800,3725 ; U2.30@5015.63,3890.91 4944.76,3890.91 4855,3801.14 4855,3780 R22.2@4800,3725 ; v2(5250,3395) 5269.53,3414.53 U11.16
  Bottom Layer w10: v2(4800,3675) 4800,3416 4821,3395 v2(5250,3395)
MII_RX_CLK: U2.38 U11.15 | length 648.4
  Top Layer w10: v2(5000,3633.86) 5049.86,3633.86 5092.15,3676.15 U2.38 ; v2(5294,3557) 5294,3495.03 5303.03,3486 U11.15
  Bottom Layer w10: v2(5000,3633.86) 5000,3618.11 5078.11,3540 5271,3540 5294,3563 v2(5294,3557)
MII_RX_DV: U2.39 U11.23 | length 806.9
  Top Layer w10: U2.39 5111.83,3661.83 4935,3485 4935,3275.55 4985,3225.55 U11.23
MII_RX_ER: U2.41 U11.29 | length 1134
  Top Layer w10: v2(4895,3440) 4895,3090 4920,3065 5114.92,3065 5157.36,3107.44 U11.29 ; v2(4999.76,3470) 5054.76,3525 5085,3525 5151.2,3591.2 U2.41
  Bottom Layer w10: v2(4895,3440) 4969.76,3440 v2(4999.76,3470)
MII_RXD0: U2.43 U11.24 | length 885.5
  Top Layer w10: v2(4959,3184) 4980.87,3205.87 U11.24 ; v1(4975,3325) 4975,3325.82 5190.57,3541.4 U2.43
  Bottom Layer w10: v2(4959,3184) 4975,3200 v1(4975,3325)
MII_RXD1: U2.44 U11.25 | length 991.8
  Top Layer w10: v1(4975,3102.24) 4975,3125 5036.18,3186.18 U11.25 ; v1(5025,3275) 5029.6,3279.6 5029.6,3354.26 5210.26,3534.92 U2.44
  Bottom Layer w10: v1(4975,3102.24) 4975,3125 5025,3175 v1(5025,3275)
MII_RXD2: U2.45 U11.26 | length 890.2
  Top Layer w10: v1(5050,3100) 5050,3125 5091.5,3166.5 U11.26 ; v1(5075,3325) 5075,3373.5 5229.94,3528.44 U2.45
  Bottom Layer w10: v1(5050,3100) 5075,3125 v1(5075,3325)
MII_RXD3: U2.46 U11.27 | length 746.6
  Top Layer w10: v1(5116.02,3125.16) 5137.68,3146.81 U11.27 ; v1(5125,3275) 5125,3378 5249.63,3502.63 U2.46
  Bottom Layer w10: v1(5116.02,3125.16) 5125,3134.13 v1(5125,3275)
MII_TX_CLK: U2.1 U11.11 | length 380.3
  Top Layer w10: U2.1@5350.28,3770.43 5368.39,3770.43 5382.62,3756.2 5382.62,3415.38 U11.11
MII_TX_EN: U2.2 U11.30 | length 969
  Top Layer w10: U11.30 5267.76,3087.76 5360,3180 v2(5360,3220) ; U2.2@5350.28,3792.48 5436.89,3792.48 5470.35,3759.02 v1(5470.35,3609.41)
  Bottom Layer w10: v2(5360,3220) 5360,3223.39 5391.61,3255 5391.61,3321.61 5500,3430 5500,3579.76 v1(5470.35,3609.41)
MII_TXD0: U2.3 U11.33 | length 1090.6
  Top Layer w10: U11.33 5283.35,3053.35 5435,3205 v2(5435,3250) ; U2.3@5350.28,3812.17 5464.45,3812.17 5509.72,3766.89 v1(5509.72,3648.78)
  Bottom Layer w10: v2(5435,3250) 5435,3310 5545,3420 5545,3613.5 v1(5509.72,3648.78)
MII_TXD1: U2.4 U11.34 | length 1149.1
  Top Layer w10: U11.34 5303.03,3028.03 5511,3236 v2(5511,3261) ; U2.4@5350.28,3831.85 5488.07,3831.85 5573,3746.92 v2(5573,3714)
  Bottom Layer w10: v2(5511,3261) 5511,3346 5585,3420 5585,3702 v2(5573,3714)
MII_TXD2: U2.5 U11.10 | length 725.1
  Top Layer w10: U2.5@5350.28,3851.54 5538.46,3851.54 5570,3820 v2(5575,3820) ; U11.10 5401.46,3646.46 v1(5430,3675)
  Bottom Layer w10: v1@5440,3675 v1(5430,3675) v2(5575,3820)
MII_TXD3: U2.6 U11.61 | length 943
  Top Layer w10: U2.6@5350.28,3871.22 U2.6@5351,3871.22 ; U2.6 5599.28,3870.72 5640,3830 v1(5640,3785) ; v2@5574.61,3305 5595,3284.61 U11.61
  Bottom Layer w10: v2(5572.3,3305) 5572.3,3352.3 5640,3420 v1(5640,3785)
Net+3V3_K: +3V3.K Rled.1@4655,3199.37 | length 335.2
  Top Layer w20: Rled.1@4655,3199.37 4655,3527.5 +3V3.K
NetC11_1: C11.1 R11.1 U11.7 | length 739.3
  Top Layer w10: U11.7 5460.51,3512.95 5850.16,3902.6 R11.1 C11.1
NetD1_1: D1.1 R12.2 | length 115.4
  Top Layer w10: D1.1 R12.2
NetD2_1: D2.1 R13.2 | length 115.4
  Top Layer w10: D2.1 R13.2
NetD3_1: D3.1 R14.2 | length 115.4
  Top Layer w10: D3.1 R14.2
NetR16_2: R16.2 U12.3 | length 74.9
  Top Layer w10: U12.3 R16.2@5877.05,3101.65
NetR17_2: R17.2 U12.7 | length 86.3
  Top Layer w20: U12.7 5930.98,2810.2 R17.2
NetR25_1: R25.1 R26.1 | length 80
  Top Layer w10: R26.1@4622.6,4240 R25.1
NetR26_2: R26.2 R27.2 | length 89.9
  Top Layer w10: R26.2 4620.44,4152.16 R27.2
NetR27_1: R27.1 U2.24 | length 339.1
  Top Layer w10: R27.1@4777.4,4155 4833.39,4155 4940,4048.39 U2.24@5072.32,4048.39
NetR210_1: R210.1@5100,4231.54 U2.21 | length 365.6
  Top Layer w10: v2(5100,4190) R210.1@5100,4231.54 ; v2(5105,3965) 5131.52,3991.52 U2.21
  Bottom Layer w10: v2(5100,4190) 5100,3970 v2(5105,3965)
NetR211_1: R211.1@5165,4231.54 U2.20 | length 448.2
  Top Layer w10: U2.20 5151.2,3923.8 v2(5155,3920) ; v2(5165,4190) R211.1@5165,4231.54
  Bottom Layer w10: v2(5155,3920) 5165,3930 v2(5165,4190)
NetR219_2: R219.2 RJ45.12 | length 916.8
  Top Layer w10: RJ45.12@4908.27,4987.76 4908.27,4961.73 4961.38,4908.62 5441.38,4908.62 5568.78,4781.22 5568.78,4703.9 5610.12,4662.56 R219.2@5629.8,4662.56
NetR220_2: R220.2 RJ45.9 | length 328.9
  Top Layer w10: RJ45.9@5407.24,4987.87 5629.8,4765.31 R220.2@5629.8,4751.14
OSC_IN: 1.2 C12.1 U11.5 | length 555.5
  Top Layer w10: U11.5 5499.88,3497.2 5608.15,3605.47 C12.1 5830.98,3605.47 1.2
OSC_OUT: 1.1 C13.1 U11.6 | length 605.1
  Top Layer w10: U11.6 5480.2,3503.68 5644.98,3668.46 C13.1 5830.98,3668.46 1.1
PFB: C22.2 C23.2 C24.2 C25.1 U2.18 U2.23 U2.37 | length 1668.9
  Top Layer w10: C24.2 C22.2 5063.46,4116.54 5092.15,4087.85 U2.23 ; v2(5020,3710) 5023.74,3713.74 U2.37@5072.32,3713.74 ; U2.18 5190.57,4004.43 v2(5210,3985)
  Bottom Layer w10: 4980,3909.76 4992.13,3897.64 5122.36,3897.64 5145,3875 5185,3875 5210,3900 v2(5210,3985)
  Bottom Layer w30: C25.1 4869.92,4346.61 4980,4236.54 v2(4980,4110) 4980,3909.76 4980,3750 v2(5020,3710) 5023.46,3706.54 C23.2
PHY_RESET: C21.2 R23.1@4788.46,3795 U2.29 | length 316
  Top Layer w10: R23.1@4788.46,3795 C21.2 4870,3865 4915.59,3910.59 U2.29@5015.63,3910.59
RD+: R217.2 RJ45.3 U2.14 | length 1027.1
  Top Layer w10: U2.14 5269.31,4094.31 5279,4104 5419,4104 v2(5460,4145) 5517.6,4145 R217.2
  Bottom Layer w10: RJ45.3 5231.96,4590.23 5251.73,4610 5380,4610 5468.5,4521.5 5468.5,4153.5 v2(5460,4145)
RD-: R218.2 RJ45.6 U2.13 | length 841.3
  Top Layer w10: U2.13 5345.77,4051 v2(5348.39,4048.39) 5510.98,4048.39 R218.2
  Bottom Layer w10: RJ45.6 5081.96,4283.04 5125,4240 5287,4240 5348.39,4178.61 v2(5348.39,4048.39) ; RJ45.6@5083.23,4444.2 RJ45.6@5083.23,4444.96
STM_BUTTON: C110.1 R18.2 S1.1 U11.36 | length 2777.9
  Top Layer w10: U11.36 5342.4,3032.4 5400,3090 5490,3090 5572.4,3172.4 v1(5572.72,3172.4) ; S1.1 5820.75,4983.43 5820.75,4865.31 5881.77,4804.29 C110.1 R18.2
  Bottom Layer w10: v1(5572.72,3172.4) 5692.09,3172.4 5763.78,3244.09 5763.78,3877.95 5717.87,3923.86 5717.87,4526.93 5777.32,4586.38 5777.32,4940 S1.1
STM_LED1: R12.1 U11.37 | length 446.6
  Top Layer w10: R12.1 5334.83,2900.75 5362.09,2928 U11.37
STM_LED2: R13.1 U11.38 | length 512.4
  Top Layer w10: R13.1 5051,2877.06 5339.83,2877.06 5381.77,2919 U11.38
STM_LED3: R14.1 U11.39 | length 579.8
  Top Layer w10: R14.1 5123.36,2851 5345.46,2851 5401.46,2907 U11.39
STM_LED4: EX_CON.5 U11.40 | length 483.8
  Top Layer w10: EX_CON.5 5157,2758 5226,2827 5359,2827 5421.14,2889.14 U11.40
STM_SPI_CS: R15.2 U11.54 U12.1 | length 665.9
  Top Layer w10: U11.54 5743.98,3146.81 5785.31,3105.47 5785.31,2950.91 5800.04,2936.18 5958.54,2936.18 5977.05,2954.68 U12.1 5977.05,3090.55 R15.2
STM_SPI_MISO: U11.52 U12.2 | length 592
  Top Layer w10: U11.52 5720.35,3107.44 5748.31,3079.48 5748.31,2898.38 v1(5765.63,2881.06) ; v1(5919.17,2975.55) 5927.05,2983.43 U12.2
  Bottom Layer w15: v1(5765.63,2881.06) 5874.06,2881.06 5919.17,2926.17 v1(5919.17,2975.55)
STM_SPI_MOSI: U11.53 U12.5 | length 435
  Top Layer w10: U11.53 5732.17,3127.13 5766.81,3092.48 5766.81,2937.91 5827.05,2877.68 U12.5
STM_SPI_SCK: U11.51 U12.6 | length 549.1
  Top Layer w10: U11.51 5700.67,3087.76 5710.51,3077.91 5710.51,2802.32 5742.01,2770.83 5852.24,2770.83 5877.05,2795.63 U12.6
STM_USART1_RX: EX_CON.3 U11.43 | length 391.5
  Top Layer w10: EX_CON.3 5357,2744.32 5385,2772.32 5460.04,2772.32 5480.2,2792.48 U11.43
STM_USART1_TX: EX_CON.4 U11.42 | length 456
  Top Layer w10: EX_CON.4 5257,2741 5318.32,2802.32 5446.73,2802.32 5460.51,2816.1 U11.42
SWCLK: SWD.3 U11.49 | length 544.2
  Top Layer w10: U11.49 5667.2,3030.67 v1(5667.2,3007.05)
  Bottom Layer w10: v1(5667.2,3007.05) 5740.05,3007.05 5993,3260 SWD.3
SWDIO: SWD.2 U11.46 | length 734.8
  Top Layer w10: U11.46 5539.25,3075.95 v1(5568.78,3105.47)
  Bottom Layer w10: v1(5568.78,3105.47) 5743.47,3105.47 5998,3360 SWD.2
TD+: R215.2 RJ45.1 U2.17 | length 770.5
  Top Layer w10: U2.17 5210.26,4128.84 5253.82,4172.4 5315,4172.4 5390,4247.4 v2(5390,4325) 5497.6,4325 R215.2
  Bottom Layer w10: RJ45.1 5390,4486.16 v2(5390,4325)
TD-: R216.2 RJ45.2 U2.16 | length 680.2
  Top Layer w10: U2.16 5229.94,4109.16 5248.7,4127.91 5332.91,4127.91 v2(5425,4220) R216.2
  Bottom Layer w10: RJ45.2 5281.96,4363.04 v2(5425,4220)
pads on no net: +3V3.0 C14.0 C14.1@5206.54,3279.99 C14.1@5206.54,3280 C14.1@5273.46,3280 C14.1@5273.46,3280.01 C15.0 C15.1@5341.54,3449.99 C15.1@5341.54,3450 C15.1@5408.46,3450 C15.1@5408.46,3450.01 C16.0 C16.1@5529.54,2877 C16.1@5529.54,2877.01 C16.1@5596.46,2876.99 C16.1@5596.46,2877 C17.0 C17.1@5749.99,3387.54 C17.1@5750,3387.54 C17.1@5750,3454.46 C17.1@5750.01,3454.46 C18.0 C18.1@5116.54,2965 C18.1@5116.54,2965.01 C18.1@5183.46,2964.99 C18.1@5183.46,2965 C21.0 C21.1@4721.54,3865 C21.1@4721.54,3865.01 C21.1@4788.46,3864.99 C21.1@4788.46,3865 C22.0 C22.1@5024.99,4116.54 C22.1@5025,4116.54 C22.1@5025,4183.46 C22.1@5025.01,4183.46 C23.0 C23.1@5154.99,3773.46 C23.1@5155,3706.54 C23.1@5155,3773.46 C23.1@5155.01,3706.54 C24.0 C24.1@4934.75,4116.54 C24.1@4934.75,4183.46 C24.1@4934.76,4183.46 C26.0 C26.1@5111.54,4125 C26.1@5111.54,4125.01 C26.1@5178.46,4124.99 C26.1@5178.46,4125 C27.0 C27.1@5226.54,3779.99 C27.1@5226.54,3780 C27.1@5293.46,3780 C27.1@5293.46,3780.01 C28.0 C28.1@5074.99,3848.46 C28.1@5075,3781.54 C28.1@5075,3848.46 C28.1@5075.01,3781.54 C29.0 C29.1@5634.56,4374.99 C29.1@5634.57,4375 C29.1@5705.43,4374.99 C29.1@5705.43,4375 C31.0 C32.0 C210.0 C210.1@5179.99,4358.46 C210.1@5180,4291.54 C210.1@5180,4358.46 C210.1@5180.01,4291.54 C211.0 C211.1@5011.54,4629.99 C211.1@5011.54,4630 C211.1@5078.46,4630 C211.1@5078.46,4630.01 C212.0 C212.1@5639.56,3979.99 C212.1@5639.57,3980 C212.1@5710.43,3979.99 C212.1@5710.43,3980 D31.0 R21.0 R21.1@5511.54,3980 R21.1@5511.54,3980.01 R21.1@5578.46,3980 R21.1@5578.47,3980.01 R22.0 R22.1@4721.54,3725 R22.1@4721.54,3725.01 R22.1@4788.46,3725 R22.1@4788.47,3725.01 R23.0 R23.1@4721.53,3794.99 R23.1@4721.54,3795 R23.1@4788.46,3794.99 R23.1@4788.46,3795 R24.0 R24.1@4721.53,3934.06 R24.1@4721.54,3934.07 R24.1@4788.46,3934.06 R24.1@4788.46,3934.07 R28.0 R28.1@4721.54,4072.2 R28.1@4788.46,4072.2 R28.1@4788.47,4072.2 R29.0 R29.1@4721.53,4003.12 R29.1@4721.54,4003.13 R29.1@4788.46,4003.12 R29.1@4788.46,4003.13 R210.0 R210.1@5099.99,4231.54 R210.1@5099.99,4298.47 R210.1@5100,4231.54 R210.1@5100,4298.46 R211.0 R211.1@5164.99,4231.54 R211.1@5164.99,4298.47 R211.1@5165,4231.54 R211.1@5165,4298.46 R219.0 R219.1@5633.74,4662.55 R219.1@5633.74,4662.56 R219.1@5700.67,4662.55 R219.1@5700.67,4662.56 R220.0 R220.1@5633.74,4751.14 R220.1@5700.67,4751.14 RJ45.H Rled.0 Rled.1@4654.99,3120.63 Rled.1@4654.99,3199.37 Rled.1@4655,3120.63 Rled.1@4655,3199.37 S1.3 S1.4 U2.8 U2.9 U2.10 U2.11 U2.12 U2.33 U3.4 U11.2 U11.3 U11.4 U11.8 U11.20 U11.21 U11.22 U11.28 U11.35 U11.44 U11.45 U11.50 U11.55 U11.56 U11.57 U11.58 U11.59 U11.62

## Keep-outs
Keep-Out Layer:
  the board outline again, w7.87

## Other copper
Top Layer:
  region net 3.3V: 5767.72,4025.59 5767.72,3956.69 5885.83,3956.69 5885.83,4025.59
  region net 3.3V: 6106.3,4547.24 6106.3,4405.51 6165.36,4405.51 6165.36,4547.24
  region net 3.3V: 5984.25,4675.2 5984.25,4547.24 6165.35,4547.24 6165.35,4675.2
  region net +5V: 5937.01,4507.87 6070.87,4507.87 6070.87,4413.39 6067.24,4409.76 5980,4409.76 5980,4444.88 5937.01,4444.88
Bottom Layer:
  region net 3.3V: 5767.72,4025.59 5767.72,3956.69 5866.14,3956.69 5866.14,4025.59
  region net +5V: 5925.2,4330.71 5925.2,4507.87 6141.73,4507.87 cw(c6141.73,4448.82) 6200.79,4448.82 6200.79,2980.32 5850.39,2629.92 5531.5,2629.92 5531.5,2740.16 5818.9,2740.16 6122.05,3043.31 6122.05,4330.71
Multi-Layer:
  pour cut-out: 4842.52,4783.07 5242.52,4783.07 5468.5,4783.07 5468.5,4083.07 4842.52,4083.07

## Silkscreen, mask and mechanical layers (free items; w line width, h text height)
Top Overlay:
  lines w5: 5166.22,2933.23 5166.22,3461.77 5694.76,3461.77 5694.76,2932.24 5167.2,2932.24 5166.22,2933.23
  text "ARM" at 5561,3131 h98.43 r180
  text "Ethernet" at 4682.95,2979.49 h80
  text "TX" at 5285,2760 h80 r90
  text "RX" at 5380,2760 h80 r90
  text "GND" at 5485,2755 h80 r90
  text "5V" at 5625,2660 h80
Drill Guide:
  lines w5.91: 4979,3704 4979,3678 5028,3678

## Text inside footprints (layer, text, board x,y; h text height)
C25: Top Overlay "+" at 4677.52,4334.8 h40 r90